# Altium PCB STM32P100.PcbDoc (part 2 of 2)
Units mil, origin at the board's own origin, x right, y up, seen from the top; angles counter-clockwise.
Board outline 4100 x 1945 mil, 2 copper layers (Top Layer, Bottom Layer); 85 components, 168 nets, 446 pads, 248 vias.
Unrouted connection lines stored in the file: 48.
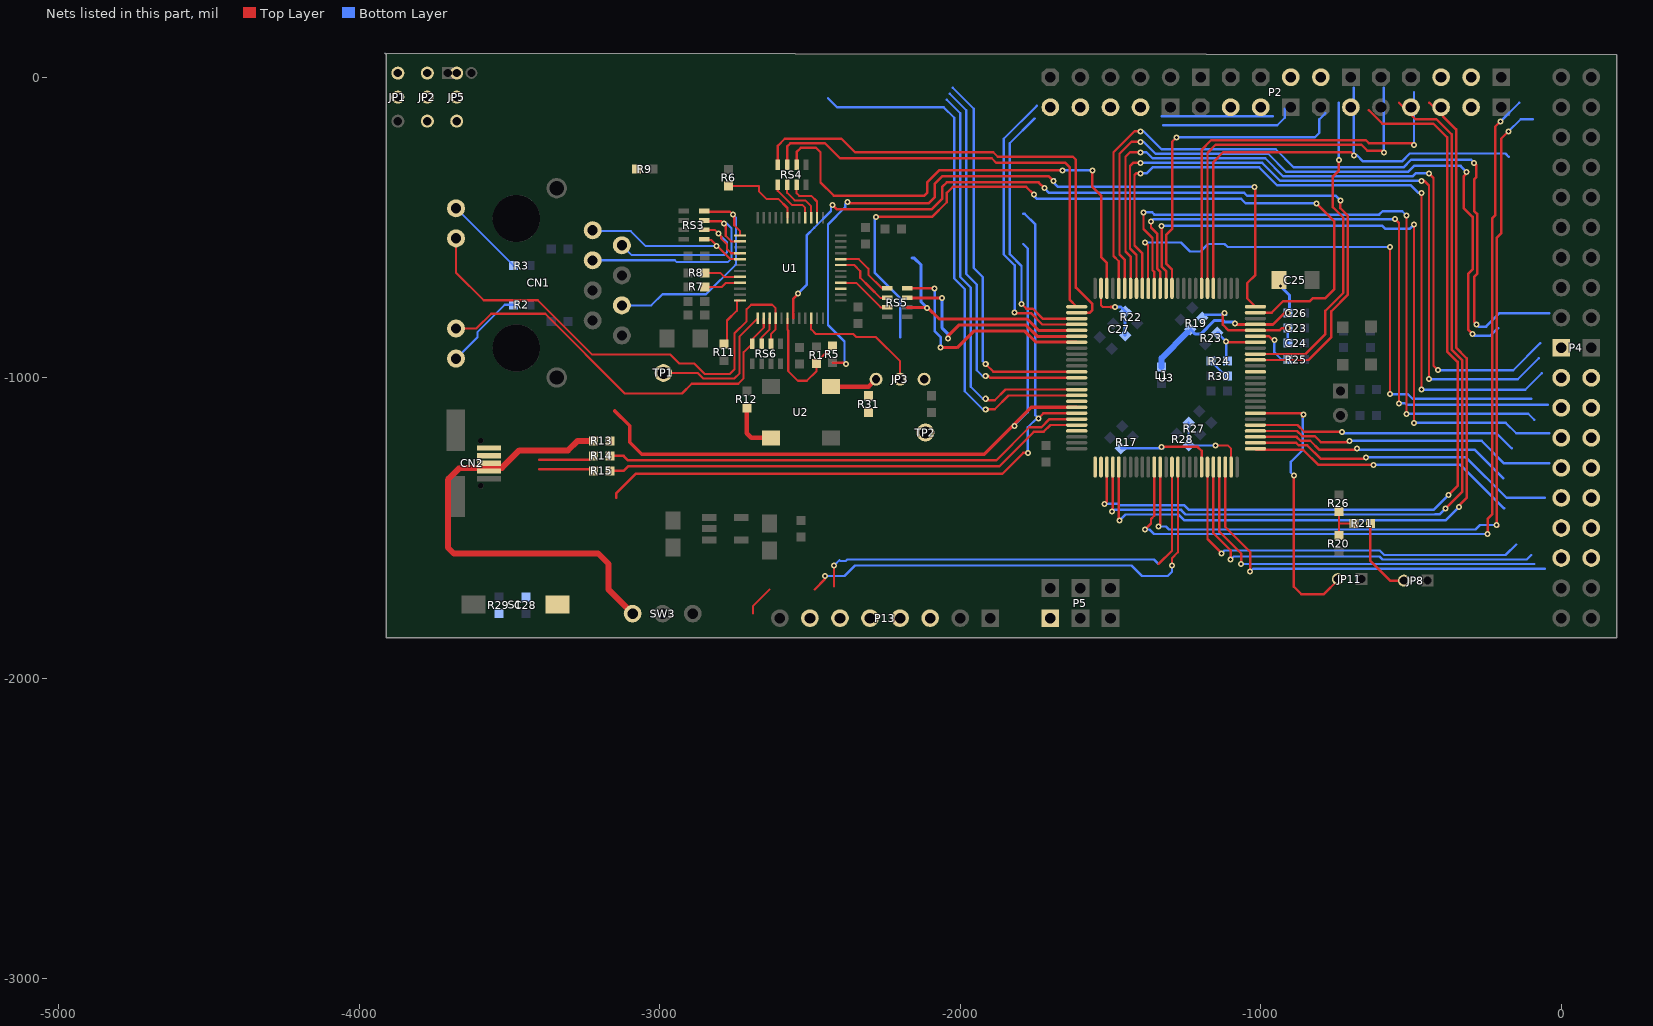
[diagram p2: the nets of this part, all layers, seen from the top]

## Via types
v1: diameter 20, hole 10, Top Layer to Bottom Layer, 248 vias

## Nets (pads, with @x,y where several pads share a name; then routed paths per layer and width w, separated by ;. In a path a pad name is that pad's centre, name@x,y a point inside that pad or via, vN(x,y) a via of type N, cw(c..) or ccw(c..) an arc to the next point about the centre after c; other vN are vias at no path point) (continued)
NetC27_2: C27.2 R22.1 U3.49 | length 225.5
  Top Layer w7: U3.49@-1531.54,-702.76 U3.49@-1531.54,-702.76 -1531.5,-758.5 -1525,-765 -1500,-765
  Top Layer w10: -1500,-765 v1(-1485,-765)
  Bottom Layer w10: v1(-1485,-765) -1465,-765 R22.1@-1450,-780 -1451.11,-781.11 C27.2@-1451.11,-858.89
NetC28_2: C28.2 R29.1 S1.2
NetCN1_1: CN1.1 RS3.8 U1.17 | length 564.3
  Top Layer w7: RS3.8@-2836.5,-542.24 -2827.76,-542.24 -2764.53,-605.47 U1.17@-2732.32,-605.47
  Bottom Layer w7: CN1.1@-3222.79,-509.32 -3219.79,-512.32 -3095.79,-512.32 -3045.79,-562.32 v1(-2810.79,-562.32)
NetCN1_2: CN1.2 RS3.6 U1.16 | length 609.2
  Top Layer w7: RS3.6@-2852.29,-508.07 -2816.93,-508.07 v1(-2804.23,-520.77) -2795,-530 -2795,-537.32 -2776.16,-556.16 -2776.16,-571.95 -2762.32,-585.79 U1.16@-2732.32,-585.79
  Bottom Layer w7: CN1.2@-3125.98,-559.32 -3092.98,-592.32 -2785.79,-592.32 -2775.79,-582.32 -2775.79,-549.21 v1(-2804.23,-520.77) v1@-2805.79,-522.32
NetCN1_3: CN1.3 RS3.4 U1.14 | length 753.7
  Top Layer w7: RS3.4@-2836.5,-479.25 -2793.86,-479.25 v1(-2785.79,-487.32) -2780,-493.11 -2780,-528.11 -2761.69,-546.42 U1.14@-2732.32,-546.42
  Bottom Layer w7: CN1.3@-3222.79,-609.32 -2949.67,-609.32 -2943.49,-615.5 -2773.96,-615.5 -2760.79,-602.32 -2760.79,-502.32 -2775.79,-487.32 v1(-2785.79,-487.32)
NetCN1_6: CN1.6 RS3.2 U1.13 | length 769.9
  Top Layer w7: RS3.2@-2836.5,-447.76 -2765.35,-447.76 v1(-2755.79,-457.32) -2751.73,-461.38 -2751.73,-493.27 -2732.32,-512.68 U1.13@-2732.32,-526.73
  Bottom Layer w7: CN1.6@-3125.98,-759.32 -3027.79,-759.32 -2990.79,-722.32 -2845.79,-722.32 -2745.79,-622.32 -2745.79,-467.32 v1(-2755.79,-457.32)
NetCN1_9: CN1.9 R3.1 | length 271.1
  Bottom Layer w7: CN1.9@-3677.79,-436.32 -3676.79,-436.32 R3.1@-3485.79,-627.32
NetCN1_10: CN1.10 RS6.6 U1.28 | length 1634.8
  Top Layer w7: CN1.10@-3677.79,-536.32 -3677.79,-650.32 -3585.79,-742.32 -3405.79,-742.32 -3225.79,-922.32 -2965.79,-922.32 -2935.79,-952.32 -2885.99,-952.32 -2850.99,-987.32 -2765.79,-987.32 -2750.79,-972.32 -2750.79,-852.32 -2710.79,-812.32 -2710.79,-772.32 -2695.79,-757.32 -2625.79,-757.32 -2614.21,-768.9 U1.28@-2614.21,-802.32 -2614.21,-839.21 -2629.25,-854.25 RS6.6@-2629.25,-886.5
NetCN1_11: CN1.11 RS6.2 U1.26 | length 1335.6
  Top Layer w7: CN1.11@-3677.79,-836.32 -3609.79,-836.32 -3560.79,-787.32 -3380.79,-787.32 -3115.79,-1052.32 -2925.79,-1052.32 -2893.46,-1020 -2738.46,-1020 -2720.79,-1002.32 -2720.79,-915.04 RS6.2@-2692.24,-886.5 -2692.24,-872.24 -2653.58,-833.58 U1.26@-2653.58,-802.32
NetCN1_12: CN1.12 R2.1 | length 276.1
  Bottom Layer w7: CN1.12@-3677.79,-936.32 -3605.79,-864.32 -3605.79,-847.32 -3515.79,-757.32 R2.1@-3485.79,-757.32
NetCN2_2: CN2.2 R14.1 | length 186.5
  Top Layer w8: -3400.94,-1273.5 -3233.5,-1273.5 R14.1@-3220,-1260
NetCN2_3: CN2.3 R15.1 | length 183
  Top Layer w8: -3400.94,-1305 -3225,-1305 R15.1@-3220,-1310
NetJP1_2: JP1.2 U3.30 | length 1669
  Top Layer w8: U3.30@-1157.52,-702.76 -1157.52,-282.52 -1125,-250 -700,-250 v1(-690,-260)
  Bottom Layer w8: -690,-35 v1(-690,-260) -680,-260 -660,-280 -530,-280 -504,-254 -186,-254 -175,-265
NetJP3_1: JP3.1
NetJP3_2: JP3.2 R31.2 TP2.1 U1.34 | length 436.6
  Top Layer w7: U1.34@-2496.1,-802.32 -2496.1,-838.9 -2480,-855 -2355,-855 -2345,-865 -2280,-865 -2200,-945 JP3.2@-2200,-1005
NetJP3_3: JP3.3 | length 160.4
  Top Layer w15: -2430,-1030 -2305,-1030 JP3.3@-2280,-1005
NetJP8_2: JP8.2 R21.1 | length 263.2
  Top Layer w8: R21.1@-635,-1485 -635,-1610 -570,-1675 JP8.2@-523.74,-1675
NetJP11_2: JP11.2 U3.7 | length 951.9
  Top Layer w8: U3.7@-1017.76,-1118.11 -860,-1118.11 -860,-1130 -857.5,-1127.5 v1(-857.5,-1122.5) ; v1(-890,-1325) -890,-1695 -865,-1720 -790,-1720 -743.74,-1673.74 JP11.2@-743.74,-1670
  Bottom Layer w8: v1(-890,-1325) -900,-1315 -900,-1280 -860,-1240 -860,-1125 v1(-857.5,-1122.5)
NetR1_1: R1.1 R5.2 U1.30 | length 402.3
  Top Layer w7: U1.30@-2574.84,-802.32 -2574.84,-840.16 -2572.06,-842.94 -2572.06,-977.94 -2540,-1010 -2510,-1010 -2478,-978 R1.1@-2478,-953 -2478,-948 R5.2@-2425,-895
NetR6_2: R6.2 U1.7 | length 269
  Top Layer w7: R6.2@-2770.79,-362.32 -2675.79,-362.32 -2670,-362.32 -2670,-380 -2645,-405 -2605,-405 -2574.84,-435.16 U1.7@-2574.84,-467.68
NetR7_1: R7.1 U1.21 | length 123.4
  Top Layer w7: R7.1@-2850,-698 -2793,-698 -2779.21,-684.21 U1.21@-2732.32,-684.21
NetR8_1: R8.1 U1.20 | length 123.3
  Top Layer w7: R8.1@-2850,-651 -2799,-651 -2785.47,-664.53 U1.20@-2732.32,-664.53
NetR9_1: R9.1 U1.39
NetR11_2: R11.2 U1.24 | length 175.9
  Top Layer w7: R11.2@-2775.79,-892.32 -2775.79,-809.84 -2743.27,-777.32 U1.24@-2743.27,-743.27 ; U1.24@-2745,-745 U1.24@-2743.27,-743.27 ; U1.24@-2732.32,-743.27 U1.24@-2743.27,-743.27
NetR12_2: R12.2 U2.1 | length 171.2
  Top Layer w15: R12.2@-2710,-1100 -2710,-1185 -2695,-1200 U2.1@-2630,-1200
NetR17_1: R17.1 U3.94 | length 339.7
  Top Layer w8: v1(-1330,-1230) -1210,-1230 -1196.89,-1243.11 U3.94@-1196.89,-1297.24
  Bottom Layer w8: R17.1@-1465,-1235 -1325,-1235 v1(-1330,-1230)
NetR20_2: R20.2 R21.2 R26.1 | length 130
  Top Layer w7: R20.2@-740,-1525 -740,-1485 ; R26.1@-740,-1445 -740,-1485 ; R21.2@-690,-1485 -740,-1485
NetR23_1: R23.1 R24.1 U3.19 | length 212.5
  Top Layer w8: v1(-1115,-880) -1113.11,-881.89 U3.19@-1017.76,-881.89
  Bottom Layer w8: R23.1@-1140,-850 R23.1@-1145,-850 v1(-1115,-880) -1115,-940 R24.1@-1110,-945
NetR27_1: R27.1 R28.1 U3.99 | length 282
  Top Layer w7: v1(-1150,-1225) -1110,-1225 -1098.46,-1236.54 U3.99@-1098.46,-1297.24
  Bottom Layer w7: R27.1@-1240,-1150 R28.1@-1240,-1225 v1(-1150,-1225)
NetR31_1: R31.1 U2.3
NetRS4_1: RS4.1 U1.4 | length 167.6
  Top Layer w7: RS4.1@-2607.24,-358.5 -2607.24,-377.76 -2560,-425 -2525,-425 -2515.79,-434.21 U1.4@-2515.79,-467.68
NetRS4_3: RS4.3 U1.3 | length 163.1
  Top Layer w7: RS4.3@-2575.75,-358.5 -2575.75,-385 -2550.75,-410 -2515,-410 -2496.1,-428.9 U1.3@-2496.1,-467.68
NetRS4_5: RS4.5 U1.2 | length 160.9
  Top Layer w7: RS4.5@-2544.25,-358.5 -2544.25,-386.25 -2535.5,-395 -2495.2,-395 -2476.42,-413.78 U1.2@-2476.42,-467.68
NetRS5_1: RS5.1 U1.44 | length 208.3
  Top Layer w7: U1.44@-2397.68,-605.47 -2337.64,-605.47 -2305.79,-637.32 -2305.79,-657.32 -2260.35,-702.76 RS5.1@-2243.5,-702.76 RS5.1@-2245,-701.26
NetRS5_3: RS5.3 U1.43 | length 212.2
  Top Layer w7: U1.43@-2397.68,-625.16 -2352.95,-625.16 -2332.68,-645.43 -2332.68,-667.32 -2300,-700 -2265.75,-734.25 RS5.3@-2243.5,-734.25
NetRS5_5: RS5.5 U1.40 | length 188
  Top Layer w7: U1.40@-2397.68,-684.21 -2345.79,-684.21 -2264.25,-765.75 RS5.5@-2243.5,-765.75
NetRS6_4: RS6.4 U1.27 | length 95.3
  Top Layer w7: RS6.4@-2660.75,-886.5 -2660.75,-865.75 -2633.9,-838.9 U1.27@-2633.9,-802.32
NetTP1_1: TP1.1 U1.25 | length 476.6
  Top Layer w7: TP1.1@-2987.79,-984.32 -2873.79,-984.32 -2855.79,-1002.32 -2750.79,-1002.32 -2734.79,-986.32 -2734.79,-863.84 U1.25@-2673.27,-802.32
NetU3_16: U3.16 | length 2999.8
  Top Layer w8: -2555.16,-802.32 -2555.16,-736.69 v1@-2535.79,-717.32 ; v1(-2425,-425) -2410,-440 -2095,-440 -2060,-405 -2060,-365 -2045,-350 -1739,-350 v1(-1720,-369) ; U3.16@-1017.76,-940.94 -840.94,-940.94 -765,-865 -765,-778.64 -710,-723.64 -710,-461.36 -735,-436.36 v1(-735,-410)
  Bottom Layer w8: v1(-2540,-720) -2510,-690 -2510,-525 -2485.79,-500.79 -2430,-445 -2430,-430 v1(-2425,-425) ; v1(-1720,-369) -1704,-385 -1055,-385 -1045,-395 -750,-395 v1(-735,-410) -735,-420
NetU3_24: U3.24 | length 2602.8
  Top Layer w8: v1@-2280,-460 v1(-2280,-465) -2093.79,-465 -2045,-416.21 -2045,-385 -2025,-365 -1780,-365 v1(-1755,-390) ; U3.24@-1017.76,-783.46 -963.46,-783.46 -925,-745 -836.21,-745 -826.21,-735 -785,-735 -755,-705 -755,-480 v1(-815,-420)
  Bottom Layer w8: v1(-2280,-465) -2285,-465 -2285,-650 -2200,-735 -2200,-865 ; v1(-1755,-390) -1757.5,-392.5 -1745,-405 -1065,-405 -1050,-420 v1(-815,-420)
NetU3_25: U3.25 | length 2509.3
  Top Layer w8: -2425,-950 -2385,-950 v1(-2380,-955) ; v1(-2375,-415) -2370,-420 -2105,-420 -2085,-400 -2085,-355 -2060,-330 -1705,-330 v1(-1690,-345) ; v1(-1020,-365) -1017.76,-367.24 -1017.76,-657.76 -1045,-685 -1045,-736.54 U3.25@-1017.76,-763.78
  Bottom Layer w8: v1(-2380,-955) -2385,-950 -2385,-880 -2440,-825 -2440,-490 -2382.5,-432.5 -2382.5,-422.5 v1(-2375,-415) ; v1(-1690,-345) -1685,-340 -1685,-355 -1675,-365 v1(-1020,-365)
NetU3_48: U3.48 | length 1626.3
  Top Layer w8: -2544.25,-291.5 -2544.25,-249.25 -2530,-235 -2480,-235 -2465,-250 -2465,-350 -2421,-394 -2119,-394 -2110,-385 -2110,-350 -2070,-310 v1(-1660,-310) ; v1(-1559,-310) -1560,-311 -1560,-365 -1530,-395 -1530,-600 -1511.85,-618.15 U3.48@-1511.85,-702.76
  Bottom Layer w8: v1(-1660,-310) v1(-1559,-310)
NetU3_51: U3.51 | length 1512.3
  Top Layer w8: -2575.75,-291.5 -2575.75,-230.75 -2565,-220 -2450,-220 -2400,-270 -1895,-270 -1880,-285 -1650,-285 -1635,-300 -1635,-741.02 U3.51@-1612.24,-763.78
NetU3_52: U3.52 | length 1672.5
  Top Layer w8: -2607.24,-291.5 -2607.24,-228.46 -2583.79,-205 -2395,-205 -2350,-250 -1890,-250 -1875,-265 -1625,-265 -1615,-275 -1615,-700 -1560,-755 -1560,-775 -1568.46,-783.46 U3.52@-1612.24,-783.46
NetU3_55: U3.55 | length 784.8
  Top Layer w10: -2176.5,-765.75 -2110.79,-765.75 v1(-2110.79,-767.32) ; v1@-2108,-767 -2070,-805 -1776.92,-805 -1739.4,-842.52 U3.55@-1612.24,-842.52
  Bottom Layer w10: -2160.79,-602.32 -2152.68,-602.32 -2130,-625 -2130,-748.11 v1(-2110.79,-767.32)
NetU3_56: U3.56 | length 727.5
  Top Layer w10: -2176.5,-734.25 v1(-2060,-735) ; v1(-2040,-870) -2040,-860 -2005,-825 -1780.96,-825 -1743.75,-862.2 U3.56@-1612.24,-862.2
  Bottom Layer w10: v1(-2060,-735) -2060,-835 -2040,-855 v1(-2040,-870)
NetU3_57: U3.57 | length 787.8
  Top Layer w8: -2176.5,-702.76 v1(-2085,-702.76)
  Top Layer w10: v1(-2065,-900) -2010,-900 -1955,-845 -1785,-845 -1748.11,-881.89 U3.57@-1612.24,-881.89
  Bottom Layer w8: v1(-2085,-702.76) -2085,-845 -2065,-865 v1(-2065,-900)
NetU3_67: U3.67
NRST: P5.6
PA9: JP2.2 U3.68 | length 2328.3
  Top Layer w8: v1@-1822.5,-1162.5 v1(-1820,-1160)
  Top Layer w12: -3150,-1110 -3100,-1160 -3100,-1215 -3060,-1255 -1920,-1255 -1763.43,-1098.43 U3.68@-1612.24,-1098.43
  Bottom Layer w8: v1(-1820,-1160) -1775,-1115 -1775,-570 -1790,-555
PA10: JP5.2 U3.69 | length 2406.7
  Top Layer w8: -3145,-1400 -3145,-1385 -3080,-1320 -1860,-1320 -1790,-1250 v1(-1775,-1250) ; v1(-1740,-1135) -1723.11,-1118.11 U3.69@-1612.24,-1118.11
  Bottom Layer w8: -1790,-455 -1785,-455 -1750,-490 -1750,-1125 v1(-1740,-1135) ; v1(-1775,-1250) -1775,-1165 v1@-1745,-1135
PB4: U3.90 | length 1708.3
  Top Layer w7: -2690,-1785 -2690,-1760 -2635,-1705 ; -2485,-1705 -2450,-1670 v1(-2450,-1660) ; v1(-1295,-1625) -1295,-1600 -1275.63,-1580.63 U3.90@-1275.63,-1297.24
  Bottom Layer w7: v1(-2450,-1660) -2385,-1660 -2350,-1625 -1430,-1625 -1395,-1660 -1310,-1660 -1295,-1645 v1(-1295,-1625)
PB8: U3.95 | length 1312.2
  Top Layer w8: U3.95@-1177.2,-1297.24 -1177.2,-1536.28 -1130,-1583.48 v1(-1130,-1585)
  Bottom Layer w8: v1(-1130,-1585) -1120,-1575 -603.79,-1575 -588.79,-1590 -185,-1590 -150,-1555
PB9: U3.96 | length 1346.1
  Top Layer w8: U3.96@-1157.52,-1297.24 -1157.52,-1517.48 -1100,-1575 v1(-1100,-1605)
  Bottom Layer w8: v1(-1100,-1605) -1090,-1595 -605,-1595 -595,-1605 -115,-1605 -100,-1590
PE0: U3.97 | length 1327.9
  Top Layer w8: U3.97@-1137.83,-1297.24 -1137.83,-1512.17 -1065,-1585 v1(-1065,-1620)
  Bottom Layer w8: v1(-1065,-1620) -90,-1620
PE1: U3.98 | length 1366.3
  Top Layer w8: U3.98@-1118.15,-1297.24 -1118.15,-1496.85 -1035,-1580 v1(-1035,-1645)
  Bottom Layer w8: v1(-1035,-1645) -1025,-1635 -55,-1635
PE2: U3.1 | length 910.1
  Top Layer w8: U3.1@-1017.76,-1236.22 -1013.98,-1240 -858.28,-1240 -808.28,-1290 v1(-625,-1290)
  Bottom Layer w8: v1(-625,-1290) -335,-1290 -190,-1435
PE3: U3.2 | length 1042.9
  Top Layer w8: U3.2@-1017.76,-1216.54 -882.1,-1216.54 -873.64,-1225 -845,-1225 -800,-1270 -655,-1270 v1(-650,-1265)
  Bottom Layer w8: v1(-650,-1265) -316.54,-1265 -181.54,-1400 -55,-1400
PE4: U3.3 | length 894.6
  Top Layer w8: U3.3@-1017.76,-1196.85 -880.58,-1196.85 -867.43,-1210 -835,-1210 -805,-1240 -685,-1240 v1(-680,-1235)
  Bottom Layer w8: v1@-685,-1240 v1@-680,-1240 ; v1(-680,-1235) v1@-680,-1240 ; -192.5,-1335 -287.5,-1240 v1@-680,-1240
PE5: U3.4 | length 1026.6
  Top Layer w8: U3.4@-1017.76,-1177.17 -879.05,-1177.17 -861.21,-1195 -820,-1195 -800,-1215 -710,-1215 v1(-705,-1210)
  Bottom Layer w8: v1(-705,-1210) -265,-1210 -190,-1285 -40,-1285
PE6: U3.5 | length 884.9
  Top Layer w8: U3.5@-1017.76,-1157.48 -877.52,-1157.48 -855,-1180 v1(-730,-1180)
  Bottom Layer w8: v1(-730,-1180) -725,-1185 -215,-1185 -165,-1235
PE7: U3.38 | length 2188.8
  Top Layer w8: v1(-1330,-495) -1330,-630 -1315,-645 U3.38@-1315,-702.76 ; v1(-490,-1150) v1(-490,-490)
  Bottom Layer w8: v1(-1330,-495) -595,-495 -585,-505 -505,-505 v1(-490,-490) ; v1(-490,-1150) -185,-1150 -150,-1185 -40,-1185
PE8: U3.39 | length 2165.7
  Top Layer w8: v1(-1365,-480) -1365,-500 -1345,-520 -1345,-636.21 -1334.69,-646.53 U3.39@-1334.69,-702.76 ; v1(-552.5,-472.5) -540,-485 v1(-540,-1085)
  Bottom Layer w8: v1(-1365,-480) -1357.5,-472.5 v1(-552.5,-472.5) ; v1(-540,-1085) -520,-1085 -515,-1090 -45,-1090
PE9: U3.40 | length 2249.5
  Top Layer w8: v1(-1390,-450) -1390,-505 -1360,-535 -1360,-642.43 -1354.37,-648.06 U3.40@-1354.37,-702.76 ; v1(-515,-1120) v1(-515,-460)
  Bottom Layer w8: v1(-1390,-450) -1361.21,-450 -1353.71,-457.5 -606.29,-457.5 -594.79,-446 -529,-446 v1(-515,-460) ; v1(-515,-1120) -110,-1120 -90,-1140
PE10: U3.41 | length 1965.4
  Top Layer w8: v1(-1385,-550) -1375,-560 -1375,-701.81 U3.41@-1374.06,-702.76 ; v1(-570,-1055) v1(-570,-565)
  Bottom Layer w8: v1(-1385,-550) -1265,-550 -1235,-580 -1200,-580 -1175,-555 -1120,-555 -1110,-565 v1(-570,-565) ; v1(-570,-1055) -510,-1055 -495,-1070 -100,-1070
PE11: U3.42 | length 2474
  Top Layer w8: v1(-1400,-320) -1415,-320 -1420,-325 -1420,-560 -1393.74,-586.26 U3.42@-1393.74,-702.76 ; v1(-465,-1040) v1(-465,-385)
  Bottom Layer w8: v1(-1400,-320) -1380,-320 -1360,-300 -1005,-300 -945,-360 -500,-360 -475,-385 v1(-465,-385) ; v1@-460,-1035 v1(-465,-1040) -120,-1040 -65,-985
PE12: U3.43 | length 2485.9
  Top Layer w8: U3.43@-1413.43,-702.76 -1413.43,-591.57 -1435,-570 -1435,-295 -1425,-285 v1(-1400,-285) ; v1(-465,-345) -455,-345 -440,-360 v1(-440,-1005)
  Bottom Layer w8: v1(-1400,-285) -995,-285 -935,-345 v1(-465,-345) ; v1(-440,-1005) -145,-1005 -75,-935
PE13: U3.44 | length 2542.9
  Top Layer w8: U3.44@-1433.11,-702.76 -1433.11,-596.89 -1450,-580 -1450,-265 -1435,-250 v1(-1400,-250) ; v1(-440,-320) -425,-335 -425,-960 v1(-410,-975)
  Bottom Layer w8: v1(-1400,-250) -1380,-250 -1360,-270 -985,-270 -925,-330 -495,-330 -485,-320 v1(-440,-320) ; v1(-410,-975) -160,-975 -70,-885
PE14: U3.45 | length 2357.9
  Top Layer w8: U3.45@-1452.8,-702.76 -1452.8,-607.2 -1470,-590 -1470,-255 -1430,-215 v1(-1400,-215) ; v1(-315,-315) -310,-315 -325,-330 -325,-435 -295,-465 -295,-640 -310,-655 -310,-840 v1(-295,-855)
  Bottom Layer w8: v1(-1400,-215) -1390,-215 -1350,-255 -975,-255 -915,-315 -510,-315 -490,-295 -335,-295 v1(-315,-315) ; v1(-295,-855) -290,-860 -235,-860 -210,-835
PE15: U3.46 | length 2572.6
  Top Layer w8: U3.46@-1472.48,-702.76 -1472.48,-612.52 -1490,-595 -1490,-250 -1420,-180 v1(-1400,-180) ; v1(-290,-285) -282.5,-292.5 -282.5,-332.5 -290,-340 -290,-445 -280,-455 -280,-655 -290,-665 -290,-815 v1(-282.5,-822.5)
  Bottom Layer w8: v1(-1400,-180) -1390,-180 -1330,-240 -950,-240 -890,-300 -525,-300 -500,-275 -300,-275 v1(-290,-285) ; v1(-282.5,-822.5) -275,-830 -250,-830 -205,-785 -40,-785
PWM0: U3.62 | length 1278.8
  Top Layer w8: v1(-1915,-955) -1889.69,-980.31 U3.62@-1612.24,-980.31
  Bottom Layer w8: -2025,-35 -1955,-105 -1955,-635 -1925,-665 -1925,-945 v1(-1915,-955)
PWM1: U3.63 | length 1295.4
  Top Layer w8: v1@-1910,-995 -1905,-995 -1900,-1000 U3.63@-1612.24,-1000
  Bottom Layer w8: -2035,-55 -1980,-110 -1980,-655 -1945,-690 -1945,-975 -1925,-995 v1(-1915,-995)
PWM2: U3.65 | length 1374.3
  Top Layer w8: v1(-1915,-1070) -1910,-1075 -1885,-1075 -1849.37,-1039.37 U3.65@-1612.24,-1039.37
  Bottom Layer w8: -2045,-75 -2000,-120 -2000,-665 -1965,-700 -1965,-1030 -1925,-1070 v1(-1915,-1070)
PWM3: U3.66 | length 1788.1
  Top Layer w8: v1(-1915,-1105) -1885,-1105 -1839.06,-1059.06 U3.66@-1612.24,-1059.06
  Bottom Layer w8: -2440,-70 -2410,-100 -2055,-100 -2020,-135 -2020,-670 -1985,-705 -1985,-1045 -1925,-1105 v1(-1915,-1105)
RST: P13.7
RXD0: RS5.4
RXD1: RS5.2
SCL_AT: P2.5
SCL_GA: P2.20
SDA_AT: P2.3
SDA_GA: P2.18
SDCS#: P2.12
SPI0MISO: P2.6
SPI0MOSI: P2.4
SPI0SCK: P2.8
SPI1_CS1: U3.54 | length 1341.7
  Top Layer w8: v1(-1819,-783) -1817,-785 -1765,-785 -1727.17,-822.83 U3.54@-1612.24,-822.83
  Bottom Layer w8: v1(-1819,-783) -1819,-626 -1855,-590 -1855,-205 -1745,-95 ; -1330,-130 -960,-130
SPI1_CS2: U3.37 | length 1079.9
  Top Layer w8: U3.37@-1295.31,-702.76 -1295.31,-639.69 -1315,-620 -1315,-525 -1295,-505 -1295,-215 v1(-1280,-200)
  Bottom Layer w8: v1(-1280,-200) -820,-200 -805,-185 -805,-140 -785,-120
SPI1_MISO: U3.31 | length 1274.4
  Top Layer w8: U3.31@-1177.2,-702.76 -1177.2,-252.2 -1150,-225 -665,-225 -645,-245 -595,-245 v1(-590,-250)
  Bottom Layer w8: v1(-590,-250) -590,-35
SPI1_MOSI: U3.32 | length 1362.2
  Top Layer w8: U3.32@-1196.89,-702.76 -1196.89,-241.89 -1165,-210 -650,-210 -640,-220 -495,-220 v1(-490,-225)
  Bottom Layer w8: v1(-490,-225) -490,-50
SPI1_SCK: JP1.3
SPI3_CS1: U3.53 | length 1316.9
  Top Layer w8: v1(-1796,-755) -1795,-755 -1780,-770 -1758.79,-770 -1725.64,-803.15 U3.53@-1612.24,-803.15
  Bottom Layer w8: v1(-1796,-755) -1796,-627.79 -1835,-588.79 -1835,-220 -1752.5,-137.5 ; -1325,-160 -945,-160 -920,-135 -920,-105
SPI3_CS2: U3.17 | length 1077.8
  Top Layer w8: U3.17@-1017.76,-921.26 -851.26,-921.26 -785,-855 -785,-777.43 -725,-717.43 -725,-467.57 -760,-432.57 -760,-330 -740,-310 v1(-740,-275)
  Bottom Layer w8: v1(-740,-275) -740,-85
SPI3_MISO: U3.79 | length 2776.3
  Top Layer w8: v1(-1495,-1445) -1492.17,-1442.17 U3.79@-1492.17,-1297.24 ; -540,-85 -485,-140 -415,-140 -365,-190 -365,-906.21 -330,-941.21 -330,-1380 v1(-385,-1435)
  Bottom Layer w8: v1(-1495,-1445) -1490,-1440 -1265,-1440 -1250,-1455 -420,-1455 -419,-1454 -404,-1454 v1(-385,-1435)
SPI3_MOSI: U3.80 | length 2749.8
  Top Layer w8: U3.80@-1472.48,-1297.24 -1472.48,-1472.52 v1(-1470,-1475) ; -438.79,-85 -350,-173.79 -350,-900 -315,-935 -315,-1400 -340,-1425 v1(-340,-1430)
  Bottom Layer w8: v1(-1470,-1475) -1450,-1455 -1274,-1455 -1255,-1474 -384,-1474 v1(-340,-1430)
SPI3_SCK: U3.78 | length 2813.5
  Top Layer w8: v1(-1520,-1420) -1511.85,-1411.85 U3.78@-1511.85,-1297.24 ; -640,-110 -595,-155 -425,-155 -380,-200 -380,-912.43 -345,-947.43 -345,-1360 v1(-375,-1390)
  Bottom Layer w8: v1(-1520,-1420) -1474.09,-1420 -1470,-1424.09 -1254.91,-1424.09 -1240,-1439 -424,-1439 v1(-375,-1390)
ST_RESET: U3.14
TCK/SWCLK: P13.4 U3.76
TD3V3: P4.19
TDI/I2S_WS: P13.6 U3.77 | length 1167.4
  Top Layer w7: -2420,-1695 v1(-2420,-1625)
  Bottom Layer w7: v1(-2420,-1625) -2402,-1607 -2398.49,-1610.5 -2381.51,-1610.5 -2376.01,-1605 -1355,-1605 -1340,-1620
TDO/SWO/I2S_CK: P13.5
TDO/SWO/I2S_MCK: U3.89 | length 341.5
  Top Layer w7: -1340,-1620 -1295,-1575 -1295,-1297.56 U3.89@-1295.31,-1297.24
TFT_CS: P4.23
TFT_DB00: P4.27
TFT_DB01: P4.28
TFT_DB02: P4.29
TFT_DB03: P4.30
TFT_DB04: P4.31
TFT_DB05: P4.32
TFT_DB06: P4.33
TFT_DB07: P4.34
TFT_RD: P4.25
TFT_RS/DC: P4.24
TFT_RST: P4.22
TFT_SDI: P4.21
TFT_WR: P4.26
TMS/SWDIO: P13.3 U3.72
TX_EN: RS4.6
TXD0: RS4.4
TXD1: RS4.2
UART0CTS: P2.26
UART0RTS: P2.28
UART0RX: P2.32
UART0TX: P2.30
UART1RX: JP5.3 P2.15
UART1TX: JP2.3 P2.13
UART2RX: U3.87 | length 2772.6
  Top Layer w8: v1(-1340,-1495) -1334.69,-1489.69 U3.87@-1334.69,-1297.24 ; v1@-210,-1495 v1(-215,-1490) -215,-535 -200,-520 -200,-205 v1(-175,-180)
  Bottom Layer w8: v1(-1340,-1495) -1315,-1495 -1305,-1505 -285,-1505 -270,-1490 v1(-215,-1490) v1@-210,-1495 ; v1(-175,-180) -135,-140 -95,-140
UART2TX: U3.86 | length 2845.1
  Top Layer w8: v1(-1385,-1505) -1365,-1485 -1365,-1470 -1354.37,-1459.37 U3.86@-1354.37,-1297.24 ; v1(-245,-1520) -245,-1470 -230,-1455 -230,-470 -220,-460 -220,-165 v1(-202.5,-147.5)
  Bottom Layer w8: v1(-1385,-1505) -1370,-1505 -1355,-1520 -255,-1520 v1(-245,-1520) ; v1(-202.5,-147.5) -140,-85
USB_DM: R14.2 U3.70 | length 1620.8
  Top Layer w8: R14.2@-3170,-1260 -3120,-1260 -3105,-1275 -1880,-1275 -1770,-1165 -1730,-1165 -1702.8,-1137.8 U3.70@-1612.24,-1137.8
USB_DP: R15.2 U3.71 | length 1620.9
  Top Layer w8: R15.2@-3170,-1310 -3120,-1310 -3105,-1295 -1870,-1295 -1755,-1180 -1745.51,-1180 -1722.52,-1180 -1700,-1157.48 U3.71@-1612.24,-1157.48
USB_ID: CN2.4 JP5.1
USB_VBUS: JP2.1 R13.2
VCC: CN2.1 R13.1 SW3.1 | length 1519.8
  Top Layer w20: R13.1@-3220,-1210 -3272.99,-1210 -3305,-1242.01 -3400.94,-1242.01 -3467.01,-1242.01 -3525,-1300 -3665,-1300 -3705,-1340 -3705,-1565 -3685,-1585 -3205,-1585 -3170,-1620 -3170,-1705 SW3.1@-3090,-1785
VDDA: C25.1 C26.1 L1.2 R19.2 U3.22 | length 636.5
  Top Layer w10: v1(-1085,-820) -1082.17,-822.83 U3.22@-1017.76,-822.83 -958.99,-822.83 -921.16,-785 v1(-910,-785) ; C25.1@-940,-690 v1(-935,-695)
  Bottom Layer w10: R19.2@-1233.89,-838.89 -1217.78,-855 -1200,-855 -1155,-810 -1126.11,-810 -1124.11,-812 -1123,-812 -1120,-815 -1085,-815 v1(-1085,-820) ; v1(-935,-695) -905,-725 -905,-780 v1(-910,-785)
  Bottom Layer w20: L1.2@-1330,-965 -1330,-935 R19.2@-1243.89,-848.89
VREF+: C23.1 C24.1 R19.1 U3.21 | length 395.4
  Top Layer w8: v1(-1120,-785) -1126.11,-791.11 -1126.11,-823.89 -1107.48,-842.52 U3.21@-1017.76,-842.52 -937.52,-842.52 -930,-835 v1(-910,-835)
  Bottom Layer w8: R19.1@-1185,-790 -1115,-790 v1(-1120,-785) ; C24.1@-910,-885 v1(-910,-835)
VREF-: R25.1 U3.20 | length 165.5
  Top Layer w8: U3.20@-1017.76,-862.2 -972.8,-862.2 v1@-955,-880
  Bottom Layer w8: v1(-955,-875) -955,-915 -930,-940 R25.1@-910,-940
VSSA: R24.2 R30.2 | length 75.7
  Bottom Layer w8: R24.2@-1165,-945 -1115,-995 R30.2@-1110,-995
pads on no net: CN1.0 CN1.7 CN2.MH1 CN2.MH2 P2.7 P2.9 P2.23 P2.25 P2.27 P2.29 P4.1 P4.2 P4.3 P4.4 P4.5 P4.6 P4.7 P4.8 P4.9 P4.10 P4.11 P4.12 P4.13 P4.14 P4.15 P4.16 P4.17 P4.18 P4.35 P4.36 P4.37 P4.38 P5.2 P5.3 P5.5 P13.8 RS4.7 RS4.8 RS5.7 RS5.8 RS6.8 U1.1 U1.5 U1.6 U1.8 U1.9 U1.10 U1.11 U1.12 U1.33 U1.38 U1.41 U1.42 U1.45 U1.46 U3.18 U3.23 U3.26 U3.34 U3.47 U3.58 U3.59 U3.60 U3.61 U3.83 U3.84 U3.85 U3.88 U4.4 X3.0 X3.2 X3.4
copper on no net: | length 31933.6
  Top Layer w7: -3620,-1755 -3595,-1730 v1(-3595,-1690) ; -2397.68,-723.58 -2331.42,-723.58 -2257.76,-797.24 -2243.5,-797.24 ; -2223.78,-1751.22 -2223.78,-1518.78 v1(-2220,-1515) ; -2176.5,-797.24 -2147.76,-797.24 -2120,-825 -2120,-865 ; v1(-1755,-1545) -1750,-1540 -1750,-1205 -1740,-1195 -1715,-1195 -1697.17,-1177.17 ; -1531.54,-1297.24 -1530,-1298.78 ; -1515,-1635 -1425,-1635 -1395,-1665 -1290,-1665 -1245,-1620
  Top Layer w8: -3585,-210 -3585,-145 -3520,-80 -3415,-80 -3415,-195 -3395,-215 -3300,-215 -3260,-255 -2950,-255 -2900,-205 -2720,-205 -2680,-165 -2360,-165 -2340,-185 -1540,-185 -1505,-220 -1505,-601.21 -1492.17,-614.05 -1492.17,-702.76 ; -3150,-200 -3150,-120 -3115,-85 -2980,-85 -2980,-150 -2955,-175 -2730,-175 -2705,-150 -2345,-150 -2325,-170 ; -2675.79,-307.32 -2675.79,-275.79 -2585,-185 -2380,-185 -2360,-205 -1560,-205 -1525,-240 -1525,-330 v1(-1535,-340) ; v1(-1885,-935) -1885,-945 -1869.37,-960.63 -1612.24,-960.63 ; v1(-1865,-900) -1875,-900 -1834.06,-940.94 -1612.24,-940.94 -1613.19,-940 ; v1(-1822.5,-907.5) -1808.74,-921.26 -1612.24,-921.26 ; v1(-1800,-880) -1778.43,-901.57 -1612.24,-901.57 ; v1(-1435,-1480) -1420,-1465 -1420,-1440 -1395,-1415 -1395,-1298.5 -1393.74,-1297.24 ; v1(-1430,-1515) -1430,-1513.79 -1396.21,-1480 -1396.21,-1448.79 -1374.06,-1426.63 -1374.06,-1297.24 ; -1340,-1785 -1340,-1698.74 ; v1(-1325,-1559) -1326,-1560 -1325,-1560 -1315,-1550 -1315,-1297.24 ; v1(-1270,-340) -1270,-545 -1236.26,-578.74 -1236.26,-702.76 ; -1245,-1698.74 -1240,-1703.74 -1240,-1785 ; -1078.78,-702.76 -1078.78,-673.78 -1055,-650 v1(-1050,-650) ; -1017.76,-901.57 -852.79,-901.57 -810,-858.79 v1(-810,-780) ; -1017.76,-803.15 -961.94,-803.15 -918.79,-760 -830,-760 -820,-750 -778.79,-750 -740,-711.21 -740,-473.79 -780,-433.79 -780,-275 v1(-785,-275) ; v1(-850,-1330) -850,-1680 v1(-845,-1675) ; v1(-595,-660) -594,-661 -594,-714.7 -595,-715.7 -591,-719.7 -591,-1199 -570,-1220 v1(-570,-1565) ; v1(-325,-1460) -290,-1425 -290,-930 -330,-890 -330,-510 v1(-325,-505) ; v1(-287.5,-1547.5) -285,-1550 -275,-1540 -275,-1476.21 -245,-1446.21 -245,-460 -239,-454 -239,-375 -260,-354 v1(-260,-350) ; -190,-115 -120,-185 -120,-370 -130,-380 v1(-130,-480) ; -165,-340 -150,-355 ; -160,-358.74 -160,-507.6 -135,-532.6 -135,-1546.21 -165,-1576.21 -165,-1660 -140,-1685
  Top Layer w12: -3400.94,-1336.49 -3293.51,-1336.49 -3230,-1400 -3218.74,-1400
  Top Layer w20: -3228.74,-1110 -3228.74,-1116.26 -3170,-1175 -3170,-1210
  Bottom Layer w7: v1(-3595,-1690) -3555,-1730 -3535,-1730 -3480,-1785 -3445,-1785 -3285,-1785 -3195,-1695 -2680,-1695 ; v1(-2390,-1590) -2380,-1580 ; v1(-2290,-1545) v1(-1755,-1545) ; v1(-2220,-1515) -2219.5,-1514.5 -1575.5,-1514.5 v1(-1565,-1525) ; -2055,-1690 -1735,-1690 ; -1685,-1640 -1450,-1640 -1355,-1735 -1340,-1735
  Bottom Layer w8: -1930,-130 -1930,-620 -1900,-650 -1900,-920 v1(-1885,-935) ; -1915,-160 -1915,-610 -1880,-645 -1880,-870 -1865,-885 v1(-1865,-900) ; -1895,-175 -1895,-600 -1860,-635 -1860,-860 -1822.5,-897.5 v1(-1822.5,-907.5) ; -1880,-185 -1880,-593.79 -1845,-628.79 -1845,-630 -1840,-635 -1840,-850 -1830,-860 -1820,-860 v1(-1800,-880) ; -1711.26,-555 -1710,-555 -1675,-520 -470,-520 -430,-480 v1(-130,-480) ; -1711.26,-455 -1665,-455 -1635,-425 -1365,-425 -1347.5,-442.5 -612.5,-442.5 -601,-431 -116,-431 -100,-415 ; v1(-1535,-340) -1500,-340 -1490,-350 -1280,-350 v1(-1270,-340) ; v1(-1435,-1480) -1429,-1474 -1296,-1474 -1280,-1490 -355,-1490 v1(-325,-1460) ; v1(-1430,-1515) -1410,-1515 -1390,-1535 -300,-1535 v1(-287.5,-1547.5) ; -1340,-1735 -1125,-1735 -1100,-1710 -1065,-1710 -1030,-1675 v1(-845,-1675) ; v1(-1325,-1559) -1241,-1559 -1134,-1559 -1130,-1555 -580,-1555 v1(-570,-1565) ; -1315,-225 -935,-225 -885,-275 v1(-785,-275) v1@-790,-270 ; v1(-1050,-650) -840,-650 -806,-684 -171,-684 -124,-684 -75,-635 ; v1(-850,-1330) -850,-1320 -815,-1285 ; v1(-810,-780) -790,-760 -130,-760 -105,-735 ; v1(-595,-660) -595,-665 -150,-665 -105,-620 ; v1(-325,-505) v1@-325,-500 ; -315,-500 -155,-500 -145,-510 -90,-510 ; v1(-260,-350) -260,-340 -225,-305 -120,-305 -85,-340

## Keep-outs
Keep-Out Layer:
  lines w10: -3770,75 -3770,-1880 170,-1880 170,75 ; -3755,75 185,75

## Silkscreen, mask and mechanical layers (free items; w line width, h text height)
Top Overlay:
  lines w10: -4945,-2985 -1025,-2985
  text "KEY/DFU" at -4860,-1110 h35
  text "WAKE" at -4375,-1115 h35
  text "SWDIO" at -3445,-2845 h35 r90
  text "SWCLK" at -3340,-2845 h35 r90
  text "GND" at -3165,-2845 h35 r90
  text "TMS" at -3487.99,-2848 h35 r90
  text "TCK" at -3382.99,-2848 h35 r90
  text "RST" at -3765,-2850 h35 r90
  text "TDO" at -3655,-2850 h35 r90
  text "TDI" at -3560,-2850 h35 r90
  text "D3V3" at -3260,-2850 h35 r90
  text "RST" at -2865,-2850 h35 r90
  text "D3V3" at -2765,-2850 h35 r90
  text "GND" at -2665,-2850 h35 r90
  text "TRST" at -3865,-2855 h35 r90

## Text inside footprints (layer, text, board x,y; h text height)
CN1: Top Overlay "HanRun" at -3337.79,-529.32 h35 r270